# Altium PCB Inverter_DC.PcbDoc
Units mm, origin at the board's own origin, x right, y up, seen from the top; angles counter-clockwise.
Board outline 68 x 34 mm, 2 copper layers (Top Layer, Bottom Layer), stack 1.571 mm thick; 15 components, 21 nets, 57 pads, 16 vias.
Unrouted connection lines stored in the file: 33.
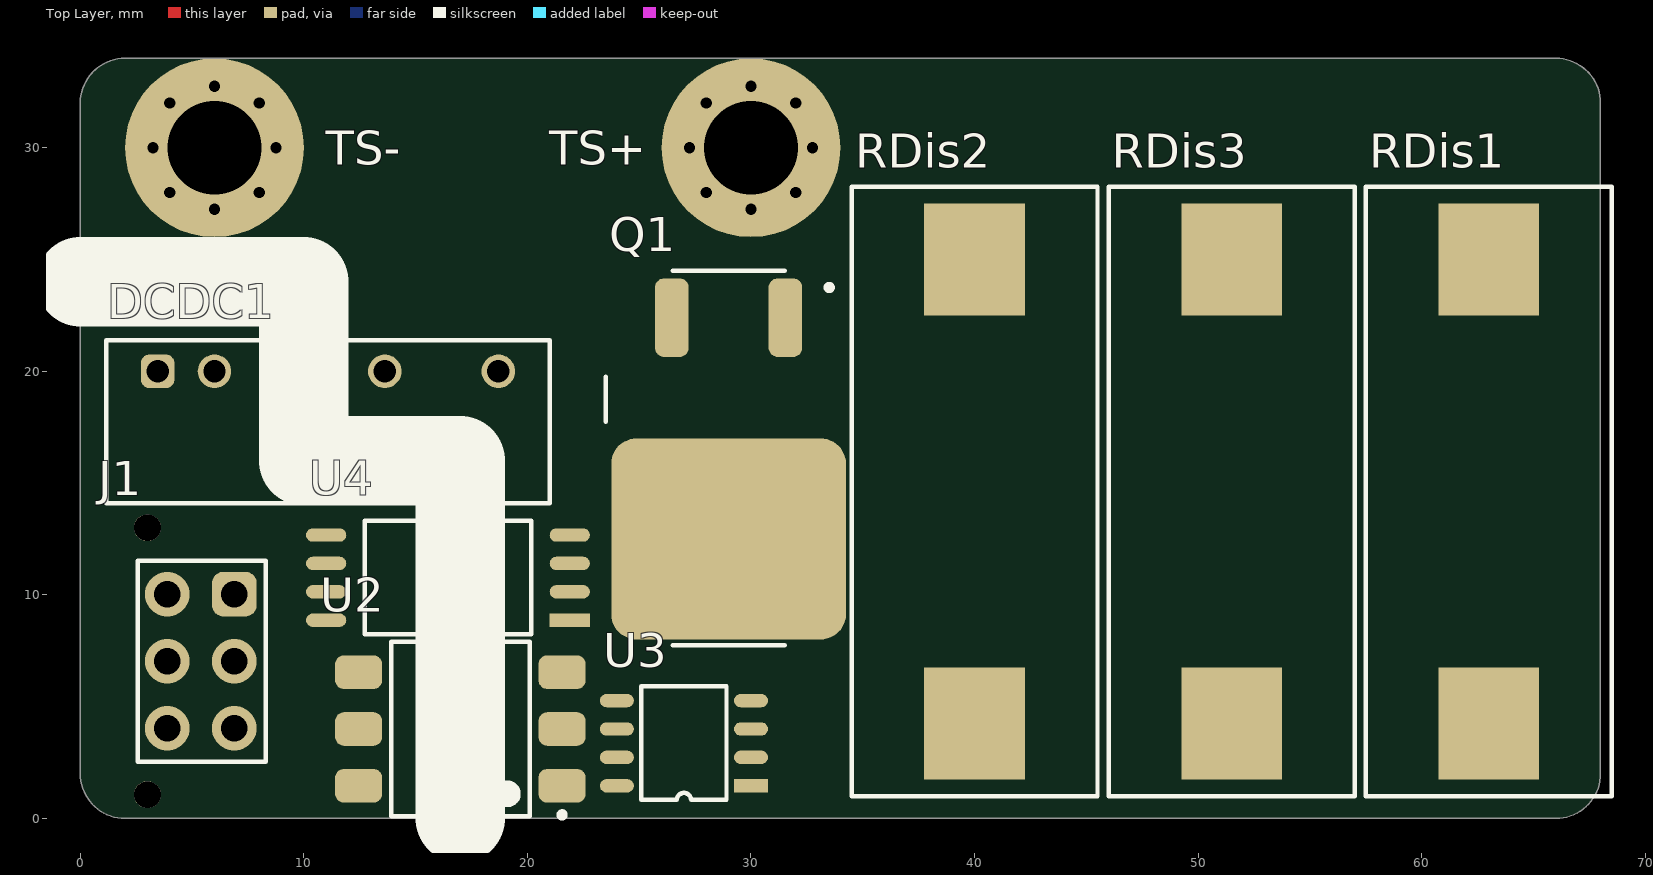
[diagram p0: Top Layer view]
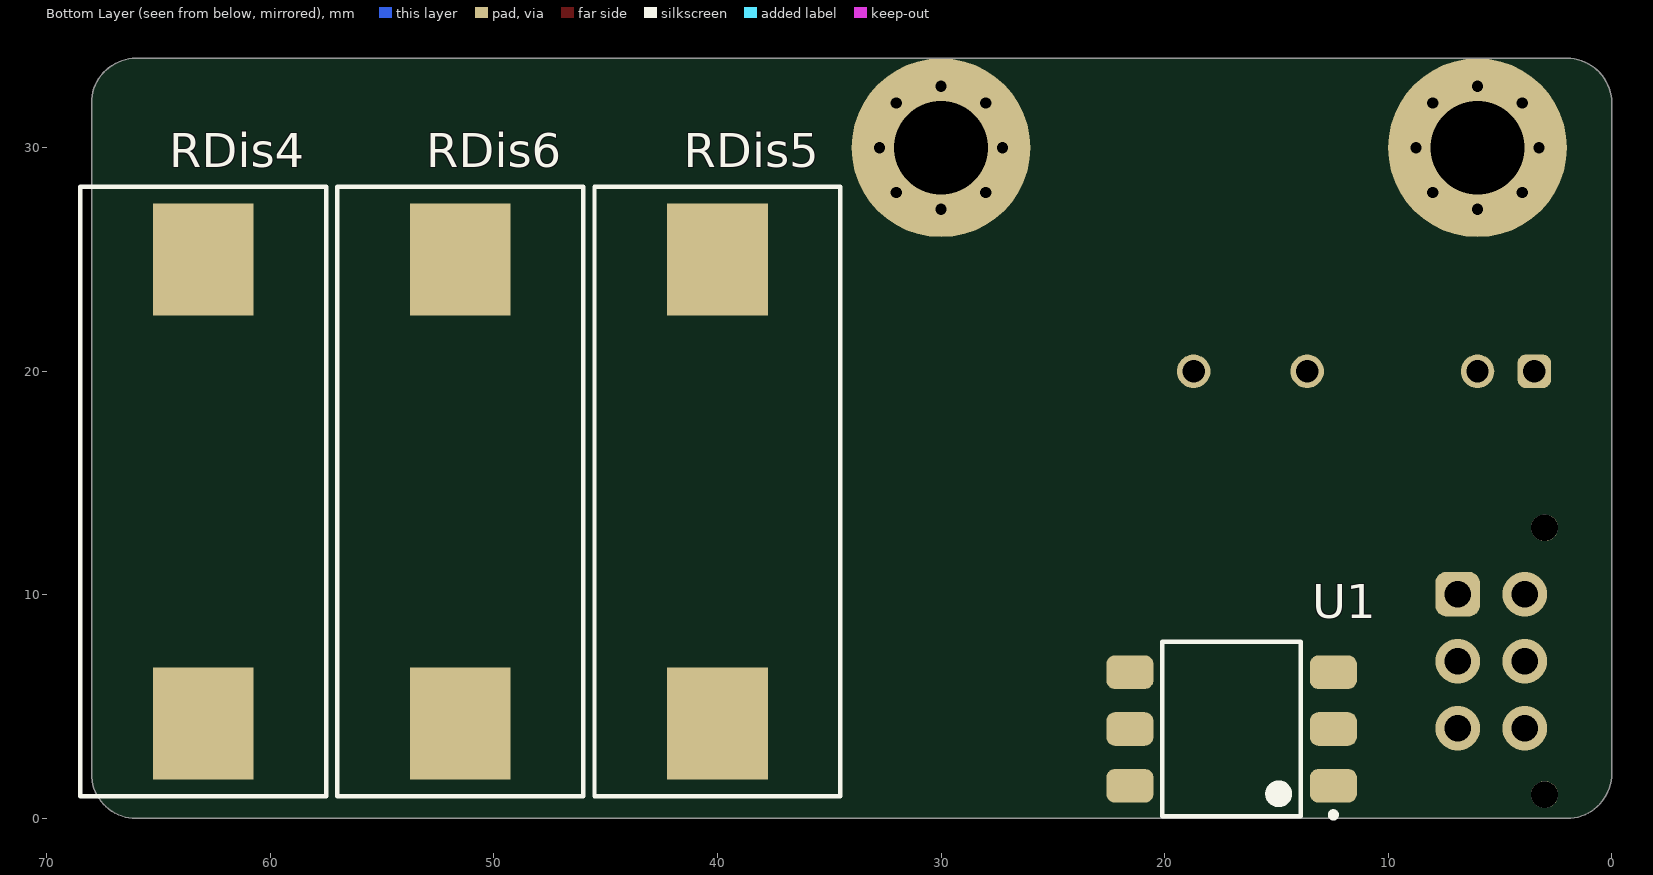
[diagram p1: Bottom Layer view, seen from below]

## Layer stack, top to bottom
Top Solder: solder mask 0.0102, Solder Resist, Dk 3.5
Top Layer: signal copper 0.0356
Dielectric 1: dielectric 1.5, FR-4, Dk 4.8
Bottom Layer: signal copper 0.0356
Bottom Solder: solder mask 0.0102, Solder Resist, Dk 3.5

## Board outline
0,2 0,32 cw(c2,32) 2,34 66,34 cw(c66,32) 68,32 68,2 cw(c66,2) 66,0 2,0 cw(c2,2)

## Design rules (kind name [scope] priority, off if disabled: settings)
Clearance [All] p1: gap=0.254 ignorepadtopadclearanceinfootprint=FALSE except(0: Arc-Hole Track-Hole SMDPad-Hole THPad-Hole Via-Hole Fill-Hole Poly-Hole Region-Hole Text-Hole)
PolygonConnect [All] p1: connectstyle=Relief reliefconductorwidth=0.254 reliefentries=4 polygonreliefangle="90 Angle" airgapwidth=0.254
RoutingVias [All] p1: holewidth=0.711 width=1.27 viastyle="Through Hole" minholewidth=0.711 minwidth=1.27 maxholewidth=0.711 maxwidth=1.27
SolderMaskExpansion [All] p1: expansion=0.102 istentingtop=FALSE
Width [All] p1: maxlimit=0.254 minlimit=0.254 preferedwidth=0.254
30 further rules are at their usual default settings.

## Components (designator, comment, footprint, x,y, rotation, side; value= is the part's Value field where it differs from the comment)
DCDC1 "1779205141" 1779205141 11.08,17.745 r0 top
J1 "43045-0612" J_MicroFit_2x3_V 4.944,7.031 r90 top
Q1 "SIHB150N60E-GE3" SIHB150N60E-GE3 29,17 r180 top
RDis1 "SMF751KJT" SMF751KJT 63,14.625 r90 top value=51kR
RDis2 "SMF751KJT" SMF751KJT 40,14.625 r90 top value=51kR
RDis3 "SMF751KJT" SMF751KJT 51.5,14.625 r90 top value=51kR
RDis4 "SMF751KJT" SMF751KJT 63,14.625 r90 bottom value=51kR
RDis5 "SMF751KJT" SMF751KJT 40,14.625 r90 bottom value=51kR
RDis6 "SMF751KJT" SMF751KJT 51.5,14.625 r90 bottom value=51kR
TS+ "Mounting_Hole_M4" Mounting_Hole_M4 30,30 r0 top
TS- "Mounting_Hole_M4" Mounting_Hole_M4 6,30 r0 top
U1 "4N35" Optocoupler_4N35 17,4 r0 bottom
U2 "4N35" Optocoupler_4N35 17,4 r180 top
U3 "LM311DR2G" LM311 30.5,1.46 r180 top
U4 "ISO224" ISO224 21.896,8.866 r180 top

## Footprints (in the part's own frame and the unit in brackets; to place one, negate y for a bottom-side part, rotate by r counter-clockwise, add the part's x,y. Pads: shape width x height; smd on the part's side, far side on the other; paste and mask are expansions set on the pad)
1779205141 [mm] "Fixed Isolated Module, SIP-7, body 19.60x7.05mm"
  rrect50% 1.5x1.5 hole 1: 1(-7.62,2.255)
  round 1.5 hole 1: 2(-5.08,2.255) 5(2.54,2.255) 7(7.62,2.255)
  silkscreen extent -9.92,-3.65 9.92,3.65, body extent -9.8,-3.53 9.8,3.53, height 10.25
ISO224 [mm]
  rect 1.8x0.6 smd: 1(0,0)
  oval 1.8x0.6 smd: 2(0,-1.27) 3(0,-2.54) 4(0,-3.81) 5(10.9,-3.81) 6(10.9,-2.54) 7(10.9,-1.27) 8(10.9,0)
  silkscreen extent 1.73,-4.44 9.17,0.64, body extent -0.5,-4.85 11.04,1, height 2.72
J_MicroFit_2x3_V [mm]
  rrect50% 2x2 hole 1.2: 1(3,-1.944)
  round 2 hole 1.2: 2(0,-1.944) 3(-3,-1.944) 4(3,1.055) 5(0,1.055) 6(-3,1.055)
  round 1.2 hole 1.2: 7(-5.969,1.944) 7(5.969,1.944)
  silkscreen extent -4.5,-3.34 4.5,2.37, body extent -6.57,-4.41 6.58,4.36, height 9.92
LM311 [mm]
  rect 1.52x0.6 smd: 1(0.5,0)
  oval 1.52x0.6 smd: 2(0.5,-1.27) 3(0.5,-2.54) 4(0.5,-3.81) 5(6.5,-3.81) 6(6.5,-2.54) 7(6.5,-1.27) 8(6.5,0)
  silkscreen extent 1.59,-4.44 5.41,0.64, body extent 0.5,-4.35 6.5,0.55, height 1.75
Mounting_Hole_M4 [mm]
  round 8 hole 4.2: 1(0,0)
Optocoupler_4N35 [mm] "SOP, 6-Leads, Body 7,30x6,50mm, Pitch 2,54mm, IPC Medium Density"
  rrect50% 2.1x1.5 smd: 1(-4.55,2.54) 2(-4.55,0) 3(-4.55,-2.54) 4(4.55,-2.54) 5(4.55,0) 6(4.55,2.54)
  silkscreen extent -4.67,-3.9 3.1,3.96, body extent -5.08,-3.65 5.08,3.65, height 4.6
SIHB150N60E-GE3 [mm] "TO-263"
  rrect25% 10.5x9 smd: D(0,4.5)
  rrect50% 1.5x3.5 smd: G(-2.54,-5.397) S(2.54,-5.397)
  silkscreen extent -5.5,-7.5 5.5,9.25, body extent -5.2,-6 5.2,9.2, height 4.45
SMF751KJT [mm]
  rect 5x4.5 smd: 1(-10.375,0) 2(10.375,0)
  silkscreen extent -13.62,-5.5 13.63,5.5, body extent -12.45,-4.75 12.45,4.75, height 10

## Part data
DCDC1: "WPME-FISM Fixed Isolated Module, SIP-7, 5Vin, 5Vout", Case/Size Code=SIP-7, Input Voltage=5V, Input Voltage Max=5.5V, Input Voltage Min=4.5V, Isolation Voltage=3000V, Manufacturer="Wurth Elektronik", Operating Temperature Max=105°C, Operating Temperature Min=-40°C, Output Power=1W, Category="Isolated Converter", ComponentLink1Description="Website Link", ComponentLink1URL=https://www.we-online.com/redexpert/article/1779205141?ad, ComponentLink2Description="Datasheet Link", ComponentLink2URL=https://www.we-online.com/redexpert/spec/1779205141?ad, Height=10.16mm, Length=19.65mm, Manufacturer Part Number=1779205141, Match Code=WPME-FISM, Mount="Through Hole", Output Voltage=5V, Packaging=Tube, Width=6mm
J1: library part J_MicroFit_2x3_V, "Micro fit Header, 2 Row, Vertical, Polarizing Peg, 6 Pin, Tin Plate, SMT/Glow Wire, Kinked Leads", Manufacturer=Molex, Supplier Part Number 1=2332898, .Creator=DO, Category="Headers and Wire Housings", ComponentLink1Description=Datasheet, ComponentLink1URL=https://www.molex.com/pdm_docs/sd/430450612_sd.pdf, ComponentLink2Description=https://datasheet.ciiva.com/11748/0900766b800bd7d2-11748707.pdf?src-supplier=RSComponents, ComponentLink2URL=https://datasheet.ciiva.com/11748/0900766b800bd7d2-11748707.pdf?src-supplier=RSComponents, ComponentLink3Description=https://datasheet.ciiva.com/19462/883464-19462371.pdf?src-supplier=Jameco, ComponentLink3URL=https://datasheet.ciiva.com/19462/883464-19462371.pdf?src-supplier=Jameco, ComponentLink4Description=https://datasheet.ciiva.com/30194/128550430450612-pcb-headers-30194512.pdf?src-supplier=Onlinecomponents.com, ComponentLink4URL=https://datasheet.ciiva.com/30194/128550430450612-pcb-headers-30194512.pdf?src-supplier=Onlinecomponents.com, ComponentLink5Description=https://datasheet.ciiva.com/9468/0430450612-pcb-headers-9468492.pdf?src-supplier=Avnet, ComponentLink5URL=https://datasheet.ciiva.com/9468/0430450612-pcb-headers-9468492.pdf?src-supplier=Avnet, ComponentLink8Description="Where buy it", ComponentLink8URL=https://www.molex.com/molex/products/part-detail/pcb_headers/0430450612, Manufacturer Part Number=43045-0612, Pricing 1="5=1,45500, 100=1,26700, 375=1,08900, 1500=0,90900, 3000=0,72900 (USD)", RoHS=Yes, Stock 1=2635, Supplier 1=RSComponents
Q1: "Mosfet, N-ch, 600V, 22A, TO-263 Rohs Compliant: Yes", Manufacturer 1=Vishay, Package=TO-263, Supplier Part Number 1=742-SIHB150N60E-GE3CT-ND, Ids(max)="22 A", Manufacturer Part Number 1=SIHB150N60E-GE3, Pricing 1="1=3,670000, 10=3,081000, 100=2,492500, 500=2,215540 (USD)", Stock 1=1000, Supplier 1=Digi-Key, Vds(max)="600 V", Vgs(typ)="10 V"
RDis1 RDis2 RDis3 RDis4 RDis5 RDis6: "Resistor Metal Film 51K Ohm 5% 7W ±100ppm/°C Molded SMD T/R", Manufacturer 1="TE Connectivity", Operating Supply Voltage=750V, Power Rating=7W, Supplier Part Number 1=1712-SMF751KJTCT-ND, Category="Chip SMD Resistors", Manufacturer Part Number 1=SMF751KJT, Pricing 1="1=2,33, 10=1,964, 25=1,9192, 50=1,8062, 100=1,4977 (USD)", RoHS=Yes, Stock 1=1156, Supplier 1=Digi-Key
U1 U2: library part Optocoupler_4N35, "Optocoupler DC-IN 1-CH Transistor With Base DC-OUT 6-Pin PDIP SMD T/R", Case/Package=SMD/SMT, Collector Emitter Saturation Voltage=300mV, Collector Emitter Voltage (VCEO)=70V, Current Transfer Ratio=320%, Forward Current=60mA, Forward Voltage=1.65V, Isolation Voltage=5kV, Manufacturer="Vishay Lite-On", Manufacturer Part Number=CNY17-4S-TA1, Max Collector Current=150mA, Max Operating Temperature=100°C, Max Power Dissipation=250mW, Min Operating Temperature=-55°C, Package Quantity=1000, Reverse Breakdown Voltage=6V, Supplier Part Number 1=1278380P, .Creator=DO, Category=Optocouplers, Collector-emitter Voltage-Max=300mV, ComponentLink1Description=https://datasheet.ciiva.com/15118/getdatasheetpartid-187668-15118874.pdf?src-supplier=Verical, ComponentLink1URL=https://datasheet.ciiva.com/15118/getdatasheetpartid-187668-15118874.pdf?src-supplier=Verical, ComponentLink2Description=https://datasheet.ciiva.com/6573/s-110-cny17-6573733.pdf?src-supplier=Digi-Key, ComponentLink2URL=https://datasheet.ciiva.com/6573/s-110-cny17-6573733.pdf?src-supplier=Digi-Key, ComponentLink3Description="Where buy it", ComponentLink3URL=https://es.rs-online.com/web/p/circuitos-integrados-optoacopladores/1257571, Fall Time=10000ns, Input Type=DC, Lead Free="Lead Free", Max Input Current=60mA, Max Output Voltage=70V, Mount="Surface Mount", Number of Channels=1, Number of Circuits=1, Number of Elements=1, Number of Pins=6, Output Current per Channel=150mA, Output Voltage=70V, Packaging="Tape and Reel", Power Dissipation=250mW, Pricing 1="50=0,27200, 250=0,25600, 500=0,24000, 1250=0,22500, 2500=0,21200 (USD)", Radiation Hardening=No, Rise Time=10000ns, RoHS=Yes, RoHS Compliant=Yes, Series=-, Stock 1=1, Supplier 1=RSComponents
U3: "LM Series 36 V 300 nA Surface Mount Single Comparator - SOIC-8", Manufacturer 1="ON Semiconductor", Supplier Part Number 1=9254327, Category=Comparators, Manufacturer Part Number 1=LM311DR2G, Pricing 1="2500=0,145, 5000=0,142, 10000=0,139, 12500=0,138, 37500=0,133 (USD)", RoHS=Yes, Stock 1=35000, Supplier 1="Future Electronics"
U4: "Reinforced isolated amplifier for voltage sensing with ±12-V input 8-SOIC -55 to 125", Manufacturer 1="Texas Instruments", Manufacturer Part Number 1=ISO224ADWVR, Supplier Part Number 1=595-ISO224ADWVR, Category="Amplifiers - Op Amps, Buffer, Instrumentation", ComponentLink1Description=Datasheet, ComponentLink1URL=https://www.ti.com/lit/ds/symlink/iso224.pdf?ts=1702215020753&ref_url=https%253A%252F%252Fwww.ti.com%252Fproduct%252Fes-mx%252FISO224, Pricing 1="1=13,32, 10=12,25, 50=11,74, 100=10,35, 1000=8,44, 10000=8,44 (USD)", RoHS=Yes, Stock 1=3377, Supplier 1=Mouser

## Via types
v1: diameter 0.7, hole 0.5, Top Layer to Bottom Layer, 16 vias

## Nets (pads, with @x,y where several pads share a name; then routed paths per layer and width w, separated by ;. In a path a pad name is that pad's centre, name@x,y a point inside that pad or via, vN(x,y) a via of type N, cw(c..) or ccw(c..) an arc to the next point about the centre after c; other vN are vias at no path point)
+5: DCDC1.1 J1.1 U4.8
+5_TS: DCDC1.7 U3.8 U4.3
GND: DCDC1.2 J1.6 U1.2 U2.4 U4.5
NetC1_2: U4.1
NetD1_K: Q1.G U1.5
NetQ1_D: Q1.D RDis1.1 RDis2.1 RDis3.1 RDis4.1 RDis5.1 RDis6.1
NetR1_2: U1.1
NetR4_1: 
NetR5_1: 
NetR6_1: 
NetR7_1: 
NetR8_1: 
NetR13_1: U2.1 U3.7
SC_END: J1.4
TS+: RDis1.2 RDis2.2 RDis3.2 RDis4.2 RDis5.2 RDis6.2 TS+.1
  other v1: 30,27.25 28,28 32,28 27.25,30 32.75,30 28,32 32,32 30,32.75
TS-: DCDC1.5 Q1.S TS-.1 U1.4 U2.2 U3.1 U3.4 U4.4
  other v1: 6,27.25 4,28 8,28 3.25,30 8.75,30 4,32 8,32 6,32.75
TSAL_RED_ON: J1.5 U2.5
V_TSAL: U3.3
VDC_div: U3.2 U4.2
VDC_sns+: J1.2 U4.7
VDC_sns-: J1.3 U4.6
pads on no net: J1.7 U1.3 U1.6 U2.3 U2.6 U3.5 U3.6

## Silkscreen, mask and mechanical layers (free items; w line width, h text height)
Top Overlay:
  lines w4: 0,24 10,24 10,16 17,16 17,0
Mechanical 1:
  the board outline again, w0.5